# Altium PCB CindyLou Main Board copy_2023-08-16.pcbdoc (part 1 of 2)
Units mil, origin at the board's own origin, x right, y up, seen from the top; angles counter-clockwise.
Board outline 2655.6 x 2783.4 mil, 2 copper layers (Top Layer, Bottom Layer); 79 components, 76 nets, 317 pads, 120 vias.
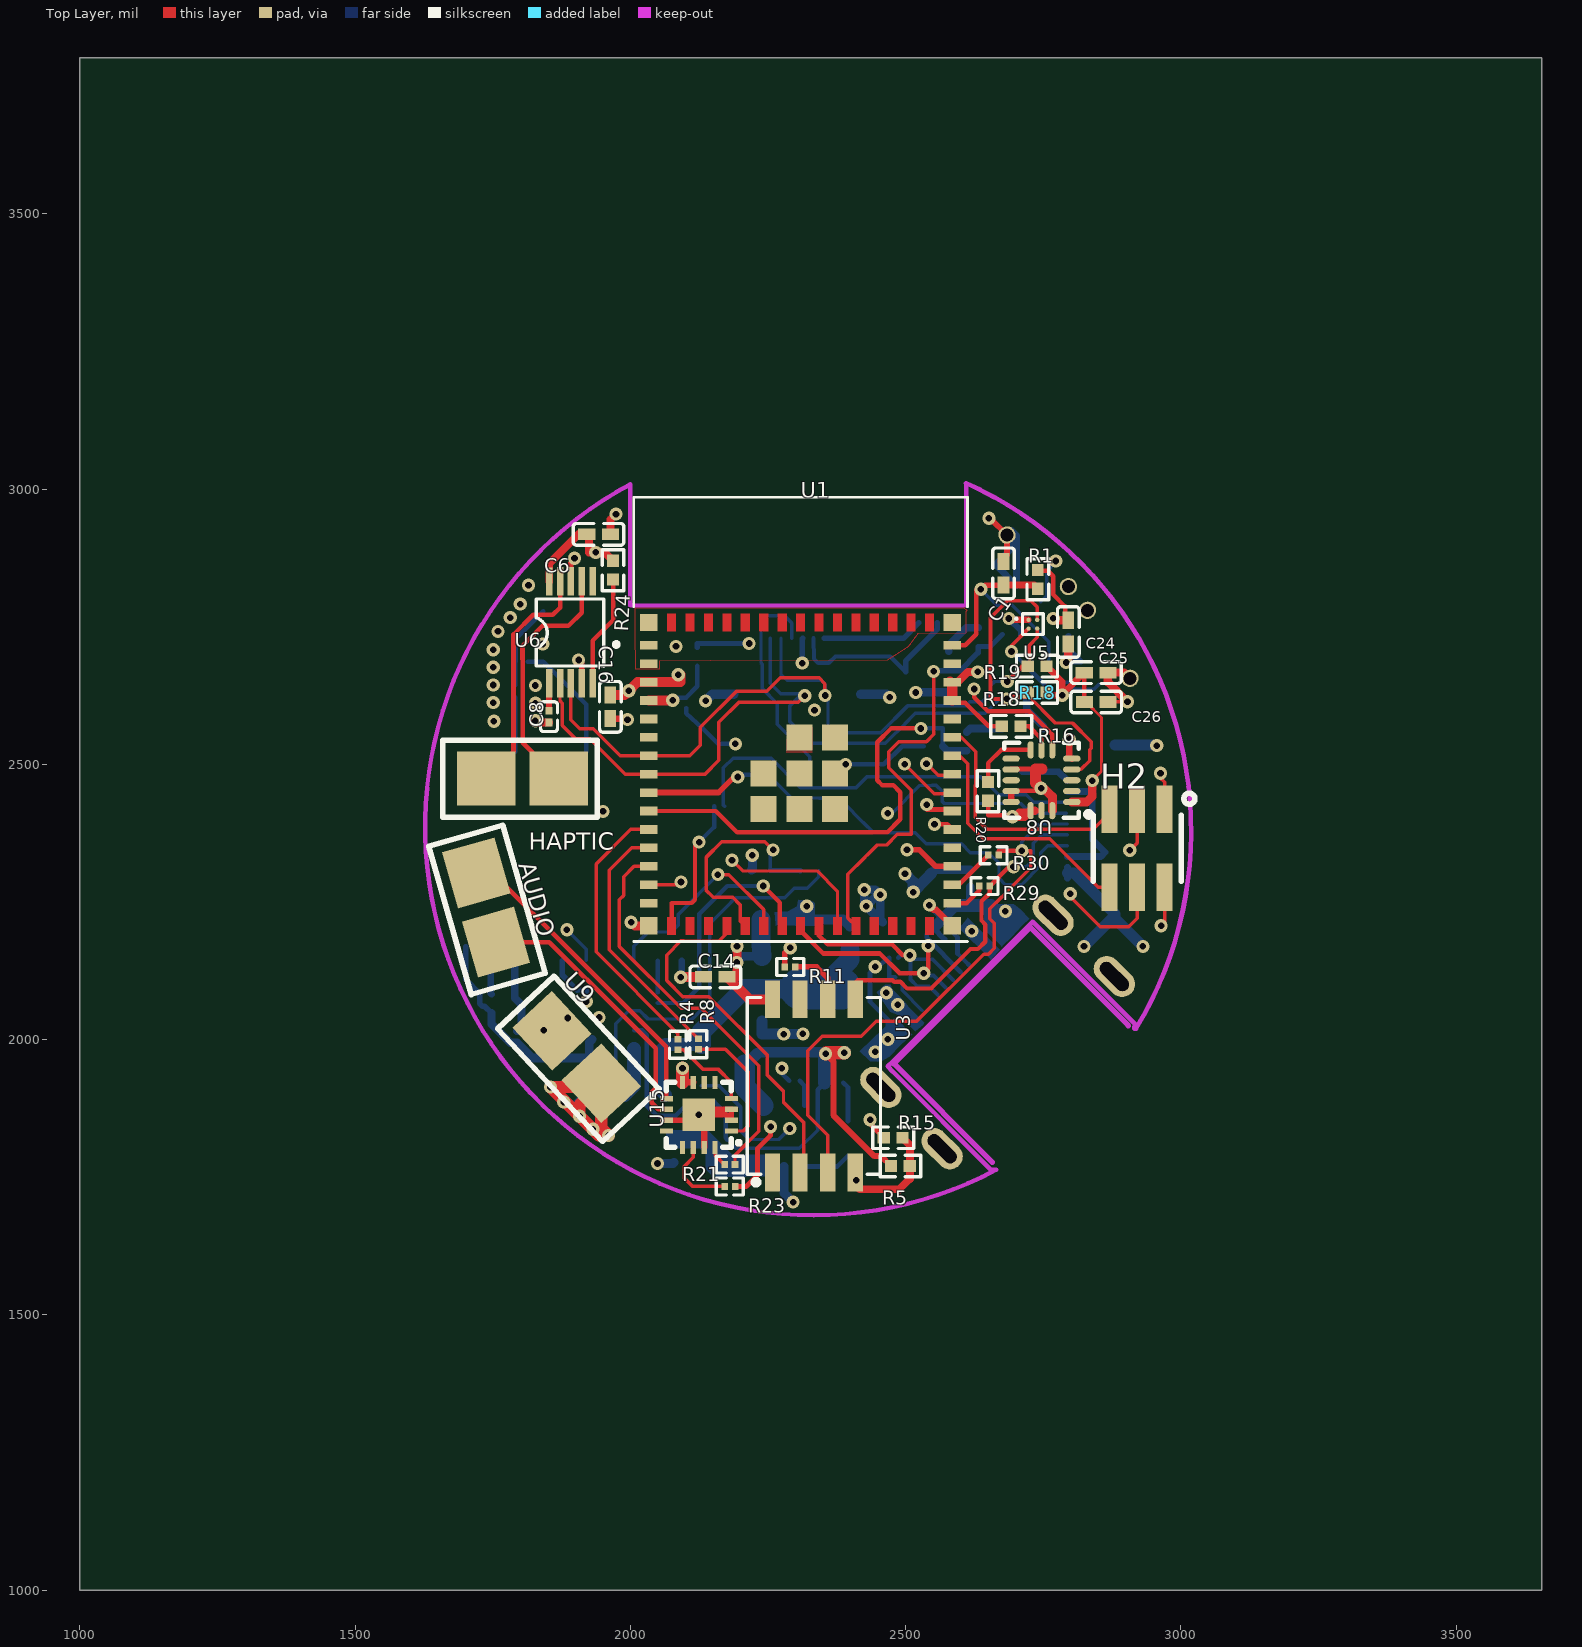
[diagram p0: Top Layer view]
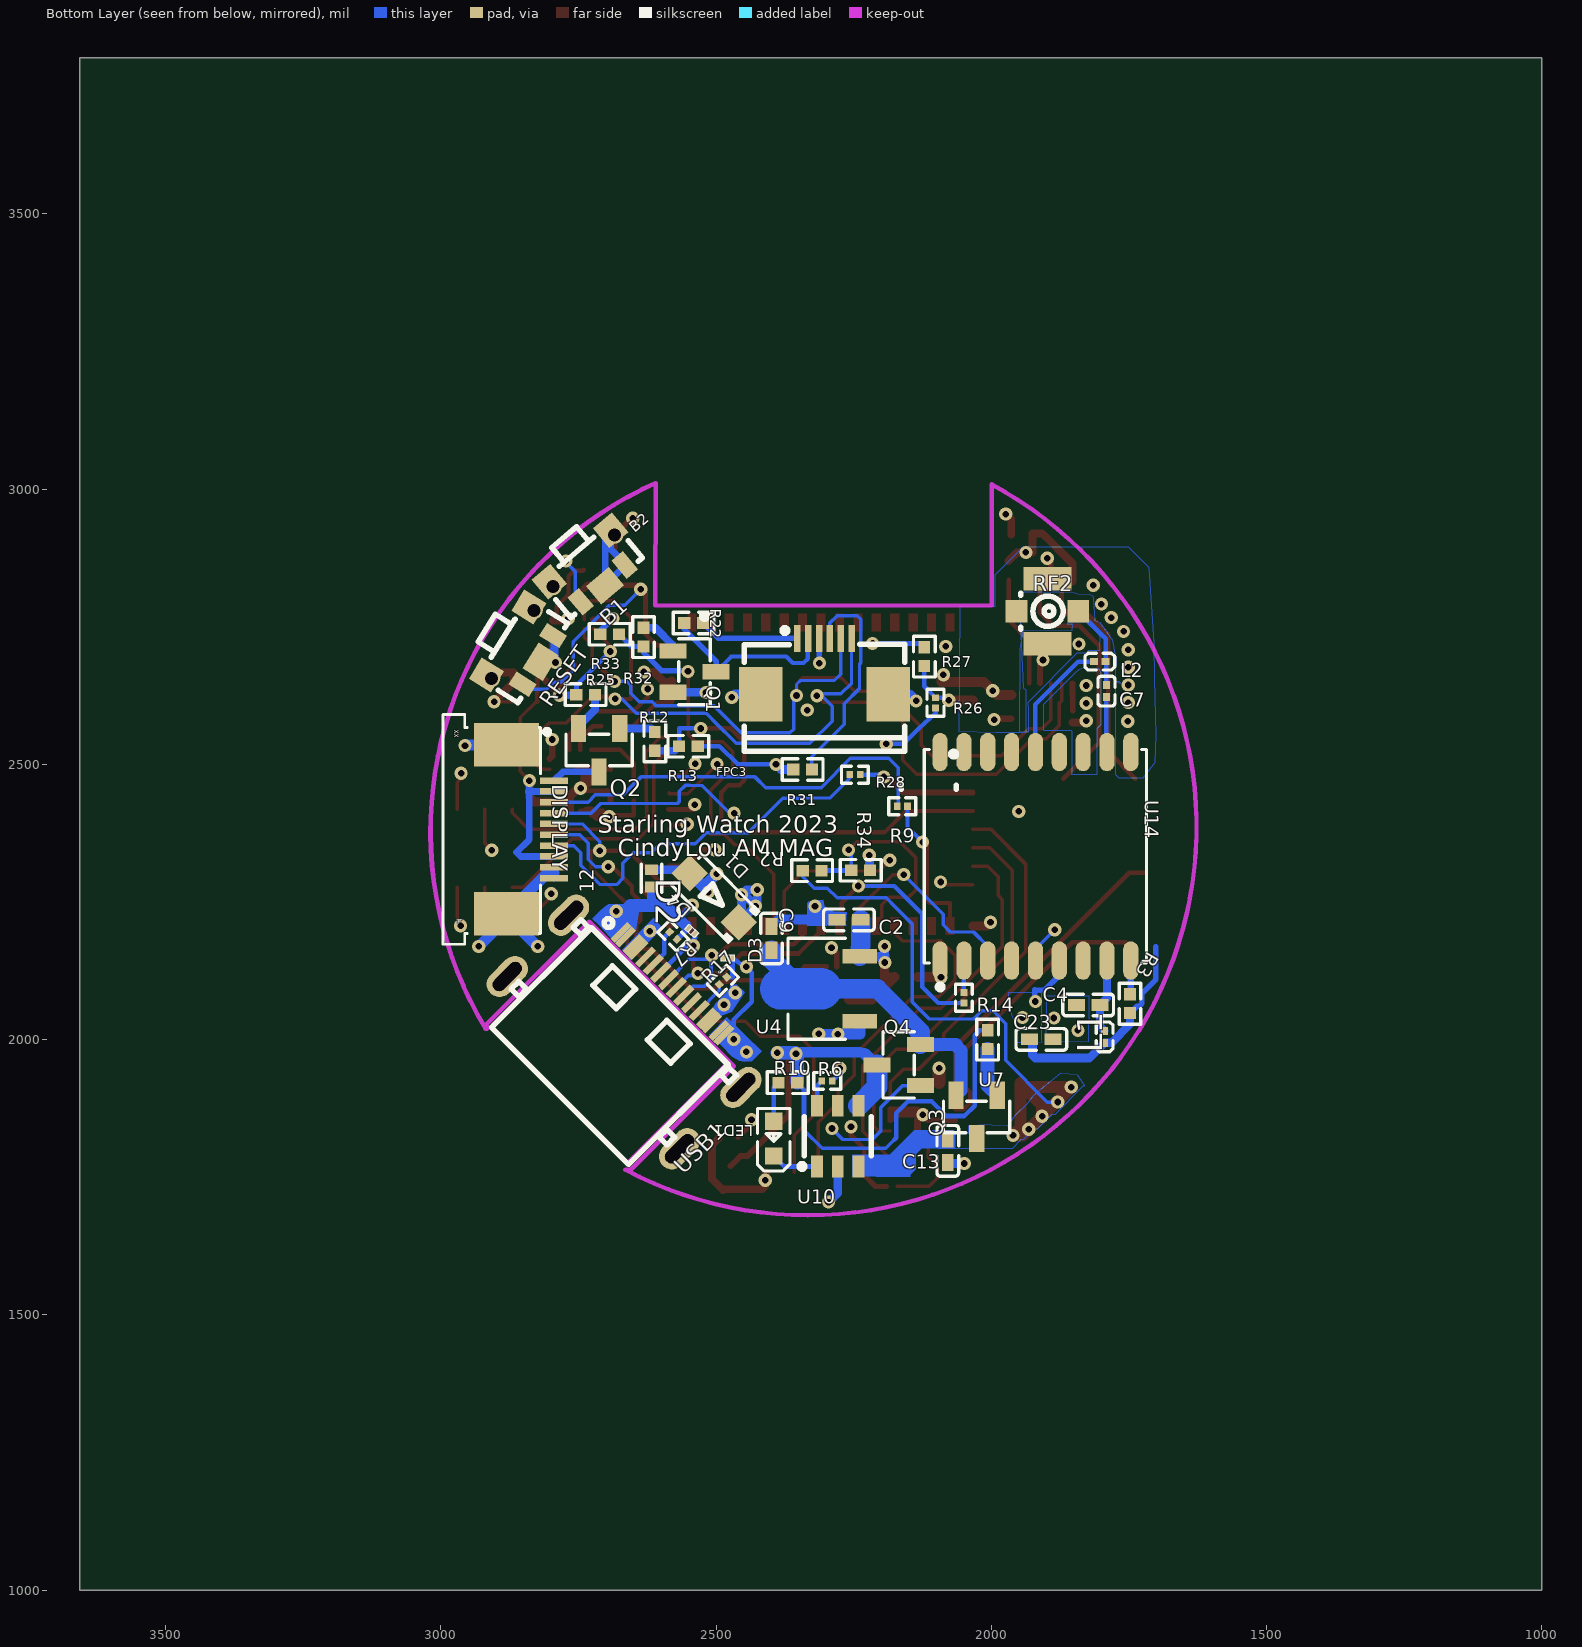
[diagram p1: Bottom Layer view, seen from below]

## Layer stack, top to bottom
Top Layer: signal copper (thickness not stored)
Dielectric: dielectric 12.6, FR-4, Dk 4.8
Bottom Layer: signal copper (thickness not stored)

## Board outline
3655.6,1000 1000,1000 1000,3783.4 3655.6,3783.4

## Components (designator, comment, footprint, x,y, rotation, side; value= is the part's Value field where it differs from the comment)
AUDIO "009176002884906" 009176002884906 1744.85,2180.16 r286 top
B1 "SKTDLHE010" KEY-SMD_SKTDLHE010 2848.72,2705.41 r302 bottom
B2 "SKTDLHE010" KEY-SMD_SKTDLHE010 2724.59,2851.6 r320 bottom
C1 "1uF" C0402#1 2677.92,2847.13 r90 top
C2 "10uF" C0402#2 2258.6,2217.6 r180 bottom
C4 "1uF" C0402#2 1823.9,2062.9 r0 bottom
C6 "1uF" C0402#1 1942.15,2917.96 r180 top
C7 "470pF" C0201#1 1790.7,2633.1 r270 bottom
C8 "1uF" C0201#2 1852.15,2586.66 r90 top
C9 "10uF" C0402#2 2399.1,2183.8 r90 bottom
C13 "10uF" C0402#2 2078.9,1797.9 r270 bottom
C14 "1uF" C0402#1 2154.3,2114 r0 top
C16 "1uF" C0402#1 1963.65,2604.66 r90 top
C23 "10uF" C0402#2 1909,2000.4 r180 bottom
C24 "2.2uF" C0402#1 2795.6,2740.5 r90 top
C25 "1uF" C0402#1 2846.02,2666.73 r180 top
C26 "1uF" C0402#1 2846.3,2613.3 r180 top
D1 "DSR1M_C466476" SOD-123FL_L2.8-W1.8-LS3.7-RD 2502.9,2257.8 r225 bottom
D2 "BDFN2C051V40" DFN-SMD_L1.0-W0.6-BI 2617.3,2292.9 r90 bottom
D3 "RCLAMP4041ZATFT" RCLAMP4021ZATFT 2478.5,2148.5 r270 bottom
D4 "RCLAMP4041ZATFT" RCLAMP4021ZATFT 2544.3,2197 r132 bottom
DISPLAY "F0501-T-10-20T-R" FPC-SMD_F0501-T-10-20T-R 2837.4,2381.9 r90 bottom
FPC3 "FPC-05F-6PH20" FPC-SMD_6P-P0.50_XUNPU_FPC-05F-6PH20 2303.05,2678.22 r0 bottom
H2 "X1321FVS-2X03-C43D48" HDR-SMD_6P-P1.27-V-F-R2-C3-LS4.8 2920.52,2347.63 r180 top
HAPTIC "009176002884906" 009176002884906 1744.45,2484.16 r180 top
L1 "47nH" L0201 1794.1,2004.9 r270 bottom
L2 "47nH" L0201 1802.8,2686.8 r180 bottom
LED1 "XL-1608SURC-06" LED0603-RD_RED 2395.13,1820.06 r270 bottom
Q1 "FDN340P_C2890122" SOT-23-3_L2.9-W1.3-P1.90-LS2.4-BR 2539.2,2668.4 r180 bottom
Q2 "FDN340P" SOT-23-3_L2.9-W1.3-P1.90-LS2.4-BR 2712.4,2525.9 r270 bottom
Q3 "FDN340P" SOT-23-3_L2.9-W1.3-P1.90-LS2.4-BR 2026.5,1859.5 r270 bottom
Q4 "FDN340P" SOT-23-3_L2.9-W1.3-P1.90-LS2.4-BR 2168.25,1953.96 r0 bottom
R1 "10KΩ" R0402#1 2740.22,2836.33 r270 top
R2 "30k" R0402#2 2325.45,2306.95 r0 bottom
R3 "6.8kΩ" R0402#2 1747.8,2065.3 r270 bottom
R4 "82Ω" R0201#1 2086.35,1990.86 r90 top
R5 "10.7K" R0402#1 2490.6,1770.3 r0 top
R6 "2kΩ" R0201#2 2298.1,1925 r0 bottom
R7 "5.6kΩ" R0201#2 2577.7,2188.8 r225 bottom
R8 "82Ω" R0201#1 2123.35,1991.76 r90 top
R9 "82Ω" R0201#2 2161.62,2423.93 r0 bottom
R10 "182Ω" R0402#2 2369.7,1921.7 r0 bottom
R11 "20Ω" R0201#1 2290.3,2131.9 r180 top
R12 "5.6KΩ" R0402#2 2611.22,2541.83 r270 bottom
R13 "100KΩ" R0402#2 2550.19,2532.9 r180 bottom
R14 "330Ω" R0201#2 2049.7,2076 r270 bottom
R15 "10.7K" R0402#1 2477.4,1821.7 r0 top
R16 "10K" R0402#1 2691.9,2569.1 r0 top
R17 "5.6kΩ" R0201#2 2487.4,2106.8 r315 bottom
R18 "1kΩ" R0402#1 2738.9,2630.6 r0 top
R19 "1kΩ" R0402#1 2738.8,2678.4 r0 top
R20 "10K" R0402#1 2649.82,2451.08 r90 top
R21 "82Ω" R0201#1 2180.55,1772.96 r0 top
R22 "10KΩ" R0402#2 2540.8,2756.9 r0 bottom
R23 "82Ω" R0201#1 2180.65,1733.16 r0 top
R24 "10K" R0402#1 1968.55,2852.76 r90 top
R25 "100Ω" R0402#2 2737.02,2626.63 r0 bottom
R26 "82Ω" R0201#2 2101.22,2611.93 r270 bottom
R27 "10KΩ" R0402#2 2121.5,2695.8 r90 bottom
R28 "82Ω" R0201#2 2247.7,2481.3 r0 bottom
R29 "20Ω" R0201#1 2643.22,2278.83 r0 top
R30 "20Ω" R0201#1 2659.82,2334.98 r0 top
R31 "10KΩ" R0402#2 2342.82,2490.78 r0 bottom
R32 "5.6KΩ" R0402#2 2631.8,2731.2 r270 bottom
R33 "100K" R0402#2 2693.19,2736.4 r0 bottom
R34 "6.8K" R0402#2 2237.15,2307.75 r0 bottom
RF2 "KH-IPEX-K501-29" ANT-SMD_KH-IPEX-K501-29 1897.92,2778.28 r270 bottom
U1 "ESP32-S3-MINI-1-CUSTOM" XCVR_ESP32-S3-MINI-1-N8-CUSTOM 2309.19,2497.8 r0 top
U3 "XTSD01GLGEAG" LGA-8_L6.0-W8.0-P1.27-BL 2333.2,1915.9 r0 top
U4 "MD7671A33PA1" SOT-89-3_L4.5-W2.5-P1.50-LS4.2-BR 2292.4,2092.3 r0 bottom
U5 "MMC5603NJ" FLIPCHIP-4_L0.8-W0.8-R2-C2-P0.40-TL 2731.2,2754.7 r0 top
U6 "DRV2605LDGSR" VSSOP-10_L3.0-W3.0-P0.50-LS4.9-BL 1891.85,2740.06 r0 top
U7 "680" R0402#2 2006.6,2000 r90 bottom
U8 "LIS3DHTR_C15134" LGA-16_L3.0-W3.0-P0.50-TL 2746.85,2471.16 r180 top
U9 "009176002884906" 009176002884906 1935.52,1918.03 r313 top
U10 "TP4057_C725791" SOT-23-6_L2.9-W1.6-P0.95-LS2.8-BR 2278.9,1824.6 r90 bottom
U14 "ATGM336H-5N31" GPSM-SMD_ATGM336H-TR 1919.72,2333.02 r180 bottom
U15 "MAX98357AETE+T" TQFN-16_L3.0-W3.0-P0.50-BL-EP1.5 2124.25,1863.36 r90 top
USB1 "USB-310CB" USB-C-SMD_20P-P0.50-L6.5-W11.2 2651.13,2029.87 r315 bottom

## Footprints (in the part's own frame and the unit in brackets; to place one, negate y for a bottom-side part, rotate by r counter-clockwise, add the part's x,y. Pads: shape width x height; smd on the part's side, far side on the other; paste and mask are expansions set on the pad)
009176002884906 [mm]
  rect 2.7x2.5 smd paste+0 mask+0.051: 1(-3.175,0.254) 2(0.152,0.254)
  silkscreen extent -4.95,-1.52 2.16,2.03
ANT-SMD_KH-IPEX-K501-29 [mm]
  rect 1.05x1 smd paste+0 mask+0.051: 1(0,1.425) 4(0,-1.425)
  rect 1.1x2.2 smd paste+0 mask+0.051: 2(1.5,0) 3(-1.5,0)
  silkscreen extent -0.84,-1.23 0.84,0.72
C0201#1 [mil]
  rect 14.51x12.76 smd paste-3937.01 mask+2: 1(10.8,0) 2(-10.8,0)
  silkscreen extent -27,-15 27,15
C0201#2 [mil]
  rect 14.51x12.76 smd paste-3937.01 mask+2: 1(-10.8,0) 2(10.8,0)
  silkscreen extent -27,-15 27,15
C0402#1 [mm]
  rect 0.79x0.54 smd paste-100 mask+0.051: 1(-0.545,0) 2(0.545,0)
  silkscreen extent -1.17,-0.5 1.17,0.5
C0402#2 [mm]
  rect 0.79x0.54 smd paste-100 mask+0.051: 1(0.545,0) 2(-0.545,0)
  silkscreen extent -1.17,-0.5 1.17,0.5
DFN-SMD_L1.0-W0.6-BI [mm]
  rect 0.5x0.6 smd paste+0 mask+0.05: 1(0.4,0) 2(-0.4,0)
  silkscreen extent -0.65,-0.47 0.65,0.47
FLIPCHIP-4_L0.8-W0.8-R2-C2-P0.40-TL [mm]
  round 0.2 smd paste-100 mask+0.051: A1(-0.2,0.2) A2(0.2,0.2) B1(-0.2,-0.2) B2(0.2,-0.2)
  silkscreen extent -0.81,-0.48 0.48,0.48
FPC-SMD_6P-P0.50_XUNPU_FPC-05F-6PH20 [mm]
  rect 0.3x1.25 smd paste+0 mask+0.05: 1(1.25,-1.288) 2(0.75,-1.288) 3(0.25,-1.288) 4(-0.25,-1.288) 5(-0.75,-1.288) 6(-1.25,-1.288)
  rect 2x2.5 smd paste+0 mask+0.05: 7(-2.94,1.288) 8(2.94,1.288)
  silkscreen extent -3.7,-1.78 3.7,3.91
FPC-SMD_F0501-T-10-20T-R [mm]
  rect 0.3x1.3 smd paste+0 mask+0.051: 1(2.25,-1.097) 2(1.75,-1.097) 3(1.25,-1.097) 4(0.75,-1.097) 5(0.25,-1.097) 6(-0.25,-1.097) 7(-0.75,-1.097) 8(-1.25,-1.097) 9(-1.75,-1.097) 10(-2.25,-1.097)
  rect 2x3 smd paste+0 mask+0.051: 11(-3.9,1.097) 12(3.9,1.097)
  silkscreen extent -5.3,-0.87 5.3,4.03
GPSM-SMD_ATGM336H-TR [mm]
  oval 0.7x1.773 smd paste+0 mask+0.051: 1(-4.4,-4.811) 2(-3.3,-4.811) 3(-2.2,-4.811) 4(-1.1,-4.811) 5(0,-4.811) 6(1.1,-4.811) 7(2.2,-4.811) 8(3.3,-4.811) 9(4.4,-4.811) 10(4.4,4.811) 11(3.3,4.811) 12(2.2,4.811) 13(1.1,4.811) 14(0,4.811) 15(-1.1,4.811) 16(-2.2,4.811) 17(-3.3,4.811) 18(-4.4,4.811)
  silkscreen extent -5.13,-6.15 5.13,4.93
HDR-SMD_6P-P1.27-V-F-R2-C3-LS4.8 [mm]
  rect 0.74x2.2 smd paste+0 mask+0.051: 1(-1.27,-1.8) 2(-1.27,1.8) 3(0,-1.8) 4(0,1.8) 5(1.27,-1.8) 6(1.27,1.8)
  silkscreen extent -2.67,-2.54 2.03,1.52
KEY-SMD_SKTDLHE010 [mm]
  rect 0.7x1.1 smd paste+0 mask+0.051: 1(1.325,0.75) 2(-1.325,0.75)
  rect 1.15x1.2 smd paste+0 mask+0.051: 3(-1.85,-0.9) 3(1.85,-0.9)
  round 0.8 hole 0.6 paste+0 mask+0.05: 3(-1.85,-0.608) 3(1.85,-0.608)
  rect 1.4x1.1 smd paste+0 mask+0.051: 3(0,0.9)
  silkscreen extent -2.16,-2.03 2.16,1.02
L0201 [mil]
  rect 14.51x12.76 smd paste-3937.01 mask+2: 1(10.8,0) 2(-10.8,0)
  silkscreen extent -27,-15 27,15
LED0603-RD_RED [mm]
  rect 0.8x0.8 smd paste+0 mask+0.051: 1(0.799,0.003) 2(-0.799,-0.004)
  silkscreen extent -1.39,-0.76 1.49,0.75
LGA-8_L6.0-W8.0-P1.27-BL [mil]
  rect 28x68.53 smd paste+0 mask+2: 1(-75,-157.3) 2(-25,-157.3) 3(25,-157.3) 4(75,-157.3) 5(75,157.29) 6(25,157.29) 7(-25,157.29) 8(-75,157.29)
  silkscreen extent -121,-180 121,160
LGA-16_L3.0-W3.0-P0.50-TL [mm]
  oval 0.8x0.28 smd paste+0 mask+0.051: 1(-1.4,1) 2(-1.4,0.5) 3(-1.4,0) 4(-1.4,-0.5) 5(-1.4,-1) 9(1.4,-1) 10(1.4,-0.5) 11(1.4,0) 12(1.4,0.5) 13(1.4,1)
  oval 0.28x0.8 smd paste+0 mask+0.051: 6(-0.5,-1.4) 7(0,-1.4) 8(0.5,-1.4) 14(0.5,1.4) 15(0,1.4) 16(-0.5,1.4)
  silkscreen extent -2.3,-1.72 1.73,1.73
R0201#1 [mil]
  rect 11.93x12.76 smd paste-3937.01 mask+2: 1(-9.51,0) 2(9.51,0)
  silkscreen extent -24,-15 24,15
R0201#2 [mil]
  rect 11.93x12.76 smd paste-3937.01 mask+2: 1(9.51,0) 2(-9.51,0)
  silkscreen extent -24,-15 24,15
R0402#1 [mm]
  rect 0.566x0.54 smd paste-100 mask+0.051: 1(-0.433,0) 2(0.433,0)
  silkscreen extent -0.94,-0.5 0.94,0.5
R0402#2 [mm]
  rect 0.566x0.54 smd paste-100 mask+0.051: 1(0.433,0) 2(-0.433,0)
  silkscreen extent -0.94,-0.5 0.94,0.5
RCLAMP4021ZATFT [mm]
  rect 0.27x0.25 smd paste+0 mask+0.05: 1(0,-0.212) 2(0,0.212)
  silkscreen extent -0.15,-0.3 0.15,0.3
SOD-123FL_L2.8-W1.8-LS3.7-RD [mm]
  rect 1.2x1.2 smd paste+0 mask+0.051: 1(1.6,0) 2(-1.6,0)
  silkscreen extent -1.8,-1 1.9,1
SOT-23-3_L2.9-W1.3-P1.90-LS2.4-BR [mm]
  rect 1.25x0.7 smd paste+0 mask+0.051: 1(-1,0.95) 2(-1,-0.95) 3(1,0)
  silkscreen extent -0.73,-1.53 0.73,1.53
SOT-23-6_L2.9-W1.6-P0.95-LS2.8-BR [mm]
  rect 1x0.55 smd paste+0 mask+0.051: 1(-1.4,0.95) 2(-1.4,0) 3(-1.4,-0.95) 4(1.4,-0.95) 5(1.4,0) 6(1.4,0.95)
  silkscreen extent -1.52,-1.55 0.9,1.78
SOT-89-3_L4.5-W2.5-P1.50-LS4.2-BR [mm]
  rect 1.575x0.672 smd paste+0 mask+0.051: 1(-1.356,1.5) 3(-1.356,-1.5)
  Top Layer region: 2.283,-0.95 0.429,-0.95 0.384,-0.949 0.34,-0.946 0.296,-0.94 0.252,-0.933 0.208,-0.924 0.165,-0.912 0.123,-0.899 0.081,-0.884 0.04,-0.866 0,-0.847 -0.04,-0.826 -0.078,-0.803 -0.115,-0.779 -0.151,-0.752 -0.185,-0.724 -0.219,-0.695 -0.251,-0.664 -0.281,-0.631 -0.31,-0.597 -0.337,-0.562 -0.362,-0.525 -0.386,-0.488 -0.408,-0.449 -0.428,-0.409 -0.447,-0.33 -2.144,-0.33 -2.144,0.33 -0.447,0.33 -0.428,0.409 -0.408,0.449 -0.386,0.488 -0.362,0.526 -0.337,0.562 -0.31,0.597 -0.281,0.631 -0.251,0.664 -0.219,0.695 -0.185,0.725 -0.151,0.753 -0.115,0.779 -0.078,0.804 -0.04,0.827 0,0.848 0.04,0.867 0.081,0.884 0.123,0.899 0.165,0.913 0.208,0.924 0.252,0.934 0.296,0.941 0.34,0.946 0.384,0.949 0.429,0.95 2.283,0.95 2.328,0.949 2.372,0.946 2.416,0.941 2.46,0.934 2.504,0.924 2.547,0.913 2.589,0.899 2.631,0.884 2.672,0.867 2.713,0.848 2.752,0.827 2.79,0.804 2.827,0.779 2.863,0.753 2.898,0.725 2.931,0.695 2.963,0.664 2.993,0.631 3.022,0.597 3.049,0.562 3.075,0.526 3.098,0.488 3.12,0.449 3.141,0.409 3.159,0.369 3.175,0.327 3.189,0.285 3.202,0.242 3.212,0.199 3.22,0.155 3.227,0.111 3.231,0.067 3.233,0.022 3.233,-0.022 3.231,-0.067 3.227,-0.111 3.22,-0.155 3.212,-0.199 3.202,-0.242 3.189,-0.285 3.175,-0.327 3.159,-0.369 3.141,-0.409 3.12,-0.449 3.098,-0.488 3.075,-0.525 3.049,-0.562 3.022,-0.597 2.993,-0.631 2.963,-0.664 2.931,-0.695 2.898,-0.724 2.863,-0.752 2.827,-0.779 2.79,-0.803 2.752,-0.826 2.713,-0.847 2.672,-0.866 2.631,-0.884 2.589,-0.899 2.547,-0.912 2.504,-0.924 2.46,-0.933 2.416,-0.94 2.372,-0.946 2.328,-0.949
  silkscreen extent -0.7,-2.33 1.95,2.33
TQFN-16_L3.0-W3.0-P0.50-BL-EP1.5 [mm]
  rect 0.25x0.6 smd paste+0 mask+0.051: 1(-0.749,-1.5) 2(-0.248,-1.5) 3(0.251,-1.5) 4(0.752,-1.5) 9(0.75,1.5) 10(0.25,1.5) 11(-0.25,1.5) 12(-0.749,1.5)
  rect 0.6x0.25 smd paste+0 mask+0.051: 5(1.5,-0.748) 6(1.5,-0.248) 7(1.5,0.252) 8(1.5,0.752) 13(-1.5,0.752) 14(-1.5,0.252) 15(-1.5,-0.248) 16(-1.5,-0.748)
  rect 1.5x1.5 smd paste+0 mask+0.051: 17(0,0)
  silkscreen extent -1.5,-1.9 1.5,1.5
USB-C-SMD_20P-P0.50-L6.5-W11.2 [mm]
  oval 2.2x1.2 hole 0.6 slot 1.65 at 0 deg paste+0 mask+0.051: 0(-1.425,5.62) 0(-1.425,-5.62) 0(2.575,5.62) 0(2.575,-5.62)
  rect 1.1x0.3 smd paste-100 mask+0.051: A1(-2.575,-3.349) A4(-2.575,-2.549) A5(-2.575,-1.25) A6(-2.575,-0.251) A7(-2.575,0.25) A8(-2.575,1.251) A9(-2.575,2.551) A12(-2.575,3.35) B1(-2.575,3.049) B4(-2.575,2.25) B5(-2.575,1.751) B6(-2.575,0.75) B7(-2.575,-0.751) B8(-2.575,-1.749) B9(-2.575,-2.25) B12(-2.575,-3.05)
  Keep-Out Layer lines w0.254: -1.779,4.423 -1.779,-4.477 ; -1.775,4.423 4.641,4.423 ; -1.76,-4.476 4.641,-4.476
  silkscreen extent -2.67,-5.08 4.74,5.08
VSSOP-10_L3.0-W3.0-P0.50-LS4.9-BL [mm]
  rect 0.3x1.3 smd paste+0 mask+0.015: 1(-1,-2.35) 2(-0.5,-2.35) 3(0,-2.35) 4(0.5,-2.35) 5(1,-2.35)
  rect 0.3x1.3 smd paste+0 mask+0.051: 6(1,2.35) 7(0.5,2.35) 8(0,2.35) 9(-0.5,2.35) 10(-1,2.35)
  silkscreen extent -1.6,-1.56 1.52,1.54
XCVR_ESP32-S3-MINI-1-N8-CUSTOM [mil]
  rect 31.5x15.75 smd paste+0 mask+4: 1(-275.59,218.66) 2(-275.59,185.2) 3(-275.59,151.73) 4(-275.59,118.27) 5(-275.59,84.8) 6(-275.59,51.34) 7(-275.59,17.87) 8(-275.59,-15.59) 9(-275.59,-49.05) 10(-275.59,-82.52) 11(-275.59,-115.98) 12(-275.59,-149.45) 13(-275.59,-182.91) 14(-275.59,-216.38) 15(-275.59,-249.84) 31(275.59,-249.84) 32(275.59,-216.38) 33(275.59,-182.91) 34(275.59,-149.45) 35(275.59,-115.98) 36(275.59,-82.52) 37(275.59,-49.05) 38(275.59,-15.59) 39(275.59,17.87) 40(275.59,51.34) 41(275.59,84.8) 42(275.59,118.27) 43(275.59,151.73) 44(275.59,185.2) 45(275.59,218.66)
  rect 31.5x31.5 smd paste+0 mask+4: 62(-275.59,260) 63(-275.59,-291.18) 64(275.59,-291.18) 65(275.59,260)
  Top Layer region: -242.13,275.75 -226.38,275.75 -226.38,244.25 -242.13,244.25
  Top Layer region: -208.66,275.75 -192.91,275.75 -192.91,244.25 -208.66,244.25
  Top Layer region: -175.2,275.75 -159.45,275.75 -159.45,244.25 -175.2,244.25
  Top Layer region: -141.73,275.75 -125.98,275.75 -125.98,244.25 -141.73,244.25
  Top Layer region: -108.27,275.75 -92.52,275.75 -92.52,244.25 -108.27,244.25
  Top Layer region: -74.8,275.75 -59.06,275.75 -59.06,244.25 -74.8,244.25
  Top Layer region: -41.34,275.75 -25.59,275.75 -25.59,244.25 -41.34,244.25
  Top Layer region: 25.59,275.75 41.34,275.75 41.34,244.25 25.59,244.25
  Top Layer region: -7.87,275.75 7.87,275.75 7.87,244.25 -7.87,244.25
  Top Layer region: 59.06,275.75 74.8,275.75 74.8,244.25 59.06,244.25
  Top Layer region: 92.52,275.75 108.27,275.75 108.27,244.25 92.52,244.25
  Top Layer region: 125.98,275.75 141.73,275.75 141.73,244.25 125.98,244.25
  Top Layer region: 159.45,275.75 175.2,275.75 175.2,244.25 159.45,244.25
  Top Layer region: 192.91,275.75 208.66,275.75 208.66,244.25 192.91,244.25
  Top Layer region: 226.38,275.75 242.13,275.75 242.13,244.25 226.38,244.25
  Top Layer region: 226.38,-275.43 242.13,-275.43 242.13,-306.93 226.38,-306.93
  Top Layer region: 192.91,-275.43 208.66,-275.43 208.66,-306.93 192.91,-306.93
  Top Layer region: 159.45,-275.43 175.2,-275.43 175.2,-306.93 159.45,-306.93
  Top Layer region: 125.98,-275.43 141.73,-275.43 141.73,-306.93 125.98,-306.93
  Top Layer region: 92.52,-275.43 108.27,-275.43 108.27,-306.93 92.52,-306.93
  Top Layer region: 59.06,-275.43 74.8,-275.43 74.8,-306.93 59.06,-306.93
  Top Layer region: 25.59,-275.43 41.34,-275.43 41.34,-306.93 25.59,-306.93
  Top Layer region: -7.87,-275.43 7.87,-275.43 7.87,-306.93 -7.87,-306.93
  Top Layer region: -41.34,-275.43 -25.59,-275.43 -25.59,-306.93 -41.34,-306.93
  Top Layer region: -74.8,-275.43 -59.06,-275.43 -59.06,-306.93 -74.8,-306.93
  Top Layer region: -108.27,-275.43 -92.52,-275.43 -92.52,-306.93 -108.27,-306.93
  Top Layer region: -141.73,-275.43 -125.98,-275.43 -125.98,-306.93 -141.73,-306.93
  Top Layer region: -175.2,-275.43 -159.45,-275.43 -159.45,-306.93 -175.2,-306.93
  Top Layer region: -208.66,-275.43 -192.91,-275.43 -192.91,-306.93 -208.66,-306.93
  Top Layer region: -242.13,-275.43 -226.38,-275.43 -226.38,-306.93 -242.13,-306.93
  silkscreen extent -303,-320 303,487

## Free pads (board coordinates)
  rect 47.24x47.24 smd paste+0 mask+4: 61(2307.02,2483.73) 61_2(2307.02,2548.69) 61_3(2371.98,2548.69) 61_4(2371.98,2483.73) 61_5(2371.98,2418.77) 61_6(2307.02,2418.77) 61_7(2242.06,2418.77) 61_8(2242.06,2483.73)

## Via types
v1: diameter 24, hole 12, Top Layer to Bottom Layer, tented both sides, 120 vias

## Nets (pads, with @x,y where several pads share a name; then routed paths per layer and width w, separated by ;. In a path a pad name is that pad's centre, name@x,y a point inside that pad or via, vN(x,y) a via of type N, cw(c..) or ccw(c..) an arc to the next point about the centre after c; other vN are vias at no path point)
0: B2.1 R27.1 | length 840.7
  Mid-Layer 2 w8: v1@2215.62,2719.63 2571.42,2719.63 2685.82,2834.03 2685.82,2864.23 2711.32,2889.73 2753.82,2889.73 2772.82,2870.73 v1(2772.8,2869.6)
  Bottom Layer w6.3: B2.1@2745.57,2795.45 2756.1,2805.98 2756.1,2850.5 2772.8,2867.2 v1(2772.8,2869.6)
  Bottom Layer w10: R27.1@2121.5,2712.84 2121.5,2719.63 v1(2215.65,2719.66)
AUDIO-OUT+: AUDIO.1 U15.9 | length 570.2
  Top Layer w8.31: AUDIO.1@1720,2303.07 1749.13,2303.07 2065.19,1987.01 U15.9@2065.2,1892.89
AUDIO-OUT-: AUDIO.2 U15.10 | length 503.4
  Top Layer w8.31: AUDIO.2@1756.12,2177.13 1852.62,2177.13 1986.02,2044.13 ; 1986.05,2044.16 2046.05,1984.16 2046.05,1911.66 2038.55,1904.16 2038.55,1885.16 2050.5,1873.2 U15.10@2065.2,1873.2
BATTERY: C13.2 Q3.3 R2.1 U9.2 U10.3 | length 1191.7
  Top Layer w22.36: v1(1907.65,1860.86) 1907.64,1881.2 U9.2@1946.91,1920.47 ; U9.2@1946.91,1920.47 1940.2,1913.76 1854.75,1913.76 1942.65,1825.86 v1(1960.45,1825.86) 1946.94,1839.36 U9.2@1946.91,1920.47
  Bottom Layer w6.3: v1@1879.02,1886.53 1897.92,1886.53 1973.72,1962.33 1973.72,2029.13 1996.72,2052.13 2017.22,2052.13 2031.92,2037.43 2112.72,2037.43 2143.92,2068.63 2143.92,2210.43 2173.92,2240.43 2191.02,2257.53 2280.12,2257.53 2297.62,2275.03 2321.62,2275.03 2342.52,2295.93 R2.1@2342.52,2306.93
  other v1: 1931.95,1837.26 1879.05,1886.56 1854.75,1913.76
BATTERY_SENSOR: R2.2 R34.1 | length 407.7
  Top Layer w6.3: 2208.8,2206.62 2199.2,2216.22 2199.2,2245.2 2185.8,2258.6 2150.3,2258.6 2137.4,2271.5 2137.4,2330.8 2166.3,2359.7 2244.1,2359.7 v1(2259.2,2344.6)
  Bottom Layer w6.3: R34.1@2254.19,2307.75 2254.19,2339.59 v1(2259.2,2344.6)
  Bottom Layer w10.3: R34.1@2254.22,2307.73 R2.2@2308.42,2306.93
BCLK: R21.1 U15.16 | length 38.5
  Top Layer w6.3: U15.16@2153.7,1804.31 2153.69,1790.31 R21.1@2171.04,1772.96
BK: R12.1 R13.2 U1.10 | length 860.4
  Top Layer w8: U1.10@2033.6,2415.28 2155.27,2415.28 2194.12,2376.43 2466.42,2376.43 2490.22,2400.23 2490.22,2449.53 2477.42,2462.43 2457.22,2462.43 2448.62,2471.03 2448.62,2540.33 2473.59,2565.3 v1(2527.79,2565.3)
  Bottom Layer w8: v1(2527.79,2565.3) 2567.22,2565.33 R13.2@2567.23,2532.9
  Bottom Layer w14: R13.2@2567.23,2532.9 2575.37,2524.76 R12.1@2611.22,2524.79
CC1: R7.2 USB1.A5 | length 71.4
  Bottom Layer w8.4: R7.2@2584.43,2195.53 2594.22,2185.72 2594.22,2156.43 USB1.A5@2614.24,2136.36
CC2: R17.1 USB1.B5 | length 62.4
  Bottom Layer w6: R17.1@2494.12,2100.08 2494.12,2089.33 USB1.B5@2530.62,2052.83
CHIP_PU: B1.1 C1.1 R1.2 U1.45 | length 574.9
  Top Layer w8.4: U1.45@2584.78,2716.46 2608.05,2716.46 2628.12,2736.53 2628.12,2818.33 v1(2636.8,2818.3)
  Top Layer w10.4: v1(2636.8,2818.3) 2644.17,2825.67 C1.1@2677.92,2825.67
  Top Layer w12.4: C1.1@2677.92,2825.67 2733.79,2825.67 R1.2@2740.22,2819.29
  Bottom Layer w6.3: v1(2636.8,2818.3) 2665.92,2789.23 2693.52,2789.23 2759.72,2722.93 2759.72,2671.53 2782.22,2649.03 2795.22,2649.03 2807.72,2636.53 2842.32,2636.53 B1.1@2851.32,2645.52
CS_DISPLAY: DISPLAY.3 R9.1 | length 752.4
  Bottom Layer w6.3: R9.1@2171.12,2423.63 2168.92,2426.13 2168.92,2493.53 2186.52,2511.13 2255.82,2511.13 2309.12,2457.83 2409.92,2457.83 2429.22,2477.13 2636.32,2477.13 2669.02,2444.53 2719.12,2444.53 2732.52,2431.13 DISPLAY.3@2794.22,2431.12
CS_STORAGEN: U3.2 | length 701
  Top Layer w6: 2091.72,2179.23 2161.72,2179.23 2175.33,2192.84 2175.33,2206.62 2177.64,2208.93 2177.64,2209.63
  Top Layer w6.3: 2096.6,2179.23 2091.72,2179.23 2065.89,2153.4 2065.89,2107.4 2095.21,2078.08 2142.41,2078.08 2248.99,1971.5 2248.99,1935.56 2263.29,1921.26 ; 2249.02,1939.93 2249.02,1935.43 2278.12,1906.33 2278.12,1886.43 2314.52,1850.03 2314.52,1764.93 U3.2@2308.2,1758.61
D/C: DISPLAY.7 R28.1 | length 700
  Bottom Layer w5.98: 2423.72,2393.73 2441.72,2375.73 2517.72,2375.73 2537.72,2355.73 2601.72,2355.73 2617.62,2339.73 2650.62,2339.73 2669.72,2320.73 2669.72,2292.73 2680.72,2281.73 2710.72,2281.73 2745.72,2316.73 2745.72,2339.73 2758.42,2352.33 DISPLAY.7@2794.22,2352.33
  Bottom Layer w6: R28.1@2257.21,2481.3 2257.22,2474.73 2293.12,2438.83 2350.63,2438.43 ; 2342.72,2438.43 2379.02,2438.43 2430.52,2386.93
DIN: R8.1 U15.1 | length 240
  Top Layer w6.3: R8.1@2123.35,1982.25 2172.72,1982.23 2213.72,1941.33 2213.72,1842.63 2205.02,1833.93 U15.1@2183.3,1833.89
DISPLAY_1: DISPLAY.1 Q2.3 | length 176.9
  Bottom Layer w8.31: Q2.3@2712.4,2486.53 2778.17,2486.53 DISPLAY.1@2794.22,2470.49
  Bottom Layer w12.32: Q2.3@2712.4,2486.53 2778.17,2486.53 DISPLAY.1@2794.22,2470.49
FPC3_1: FPC3.1 R22.2 | length 183.1
  Bottom Layer w10: FPC3.1@2352.22,2728.93 2495.82,2728.93 R22.2@2523.72,2756.93
FPC3_4: FPC3.4 R31.2 | length 401.4
  Bottom Layer w6.3: FPC3.4@2293.21,2728.91 2293.2,2756.8 2280.05,2769.96 2243.64,2769.96 2237.25,2763.56 2237.25,2684.26 2239.35,2682.16 2239.35,2637.86 2266.74,2610.46 2266.74,2572.66 2325.79,2513.61 R31.2@2325.78,2490.78
GESTURE-BOARD-POWER: FPC3.2 Q1.3 R22.1 | length 335.7
  Bottom Layer w7.87: FPC3.2@2332.58,2728.91 2333.52,2691.63 2341.02,2684.13 2360.52,2684.13 2372.52,2696.13 2472.12,2696.13 Q1.3@2499.83,2668.4
  Bottom Layer w10: Q1.3@2499.83,2668.4 2499.83,2687.73 2557.84,2745.74 R22.1@2557.84,2756.9
GESTURE-POWER: R32.1 R33.2 | length 802.5
  Top Layer w6.3: 2409.58,2206.62 2395.22,2220.98 2395.22,2300.23 2425.43,2330.44 ; 2409.62,2314.63 2448.52,2353.53 2465.52,2353.53 2485.02,2373.03 2510.02,2373.03 2510.02,2452.93 2469.32,2493.63 2469.32,2522.93 2487.82,2541.43 2537.92,2541.43 2550.92,2554.43 v1(2550.9,2668.9)
  Bottom Layer w9: R32.1@2631.8,2714.16 2653.91,2714.16 R33.2@2676.15,2736.4
  Bottom Layer w10: v1(2550.9,2668.9) 2551.7,2669.7 2598.4,2669.7 2631.8,2703.1 R32.1@2631.8,2714.16
GND: B1.2 B1.3 B2.2 B2.3 C1.2 C2.2 C4.1 C6.1 C8.1 C9.1 C13.1 C14.1 C16.1 C23.1 C24.1 C25.1 C26.1 D2.2 D3.2 D4.2 DISPLAY.9 DISPLAY.10 DISPLAY.11 DISPLAY.12 FPC3.3 FPC3.7 FPC3.8 pad.61 pad.61_2 pad.61_3 pad.61_4 pad.61_5 pad.61_6 pad.61_7 pad.61_8 R5.2 R6.2 R7.1 R13.1 R15.2 R16.1 R17.2 R31.1 R33.1 R34.2 RF2.2 RF2.3 RF2.4 U1.1 U1.2 U1.42 U1.43 U1.62 U1.63 U1.64 U1.65 U3.4 U4.1 U5.A1 U6.4 U6.8 U8.5 U8.10 U8.12 U8.13 U8.16 U9.1 U10.2 U14.1 U14.10 U14.12 U15.2 U15.3 U15.11 U15.15 U15.17 USB1.A1 USB1.A12 USB1.B1 USB1.B12 | length 3574.1
  Top Layer w6: C26.1@2867.72,2613.33 2868.09,2613.7 v1(2903.2,2613.7)
  Top Layer w7.87: U8.12@2697.22,2452.13 2746.12,2452.13 v1@2746.12,2456.43
  Top Layer w8: U1.42@2584.78,2616.07 2588.82,2612.03 2608.02,2612.03 2650.95,2569.1 R16.1@2674.86,2569.1
  Top Layer w8.3: U8.10@2691.73,2490.84 2705.53,2490.84 U8.10@2706.22,2491.53
  Top Layer w9.8: U8.10@2691.73,2490.84 2735.82,2491.53
  Top Layer w10.3: U8.12@2691.73,2451.47 2696.56,2451.47 U8.12@2697.22,2452.13
  Top Layer w10.31: U6.8@1891.82,2832.53 1891.82,2865.53 1898.45,2872.16 v1(1898.45,2874.66) ; v1@1905.95,2689.66 1911.53,2684.07 U6.4@1911.53,2647.54 ; U15.11@2065.2,1853.52 2114.4,1853.51 v1(2124.25,1863.36) ; v1(2124.25,1863.36) 2134.15,1873.26 U15.3@2183.3,1873.26 U15.2@2183.3,1853.58 2173.51,1863.36 v1(2124.25,1863.36)
  Top Layer w10.4: v1(2651.3,2947.3) 2653.6,2947.33 B2.3@2684.19,2916.76 2684.18,2880.79 2672.02,2868.63 C1.2@2677.92,2868.59
  Top Layer w11.65: C16.1@1963.65,2583.2 1992.91,2583.2 v1(1994.79,2581.32) ; v1(2687.69,2765.1) 2690.22,2762.57 U5.A1@2723.33,2762.57 ; U8.13@2691.73,2431.78 U8.12@2691.73,2451.47
  Top Layer w11.81: v1(2797.49,2545.3) 2797.49,2514.99 U8.5@2801.97,2510.53
  Top Layer w12.3: v1(2543.2,2244.4) 2551.82,2235.78 2555.62,2235.78 U1.64@2584.78,2206.62
  Top Layer w12.32: v1(2124.25,1863.36) 2134.01,1853.6 U15.15@2134.01,1804.31
  Top Layer w14.3: U3.4@2408.2,1758.61 2410.57,1756.23 v1(2410.58,1744.42) ; v1(2410.58,1744.42) 2410.57,1734.03 2416.6,1728 2486.6,1728 2487.6,1727 2507.64,1747.04 R5.2@2507.64,1770.3 2507.64,1808.5 R15.2@2494.44,1821.7 ; U1.43@2584.78,2649.53 2594.52,2649.53 2613.02,2668.03 v1(2631,2668)
  Top Layer w14.33: v1@1827.35,2579.26 1830.74,2575.86 C8.1@1852.15,2575.86 ; C6.1@1963.61,2917.96 1963.6,2944.61 v1@1973.75,2954.76
  Top Layer w15: v1(2791.6,2685.1) 2795.6,2689.1 C24.1@2795.6,2719.04 ; C25.1@2867.44,2666.77 2867.44,2649.46 v1(2903.2,2613.7) ; C25.1@2867.48,2666.73 2897.18,2666.73 B1.3@2907.62,2656.32
  Top Layer w16.3: v1(2001.3,2213.2) 2007.88,2206.62 U1.63@2033.6,2206.62 ; v1(2746.12,2456.47) 2751.42,2456.47 2766.53,2441.36 U8.16@2766.52,2416.04
  Top Layer w18: v1(2091.3,2113.2) 2092.1,2114 C14.1@2132.84,2114
  Top Layer w18.3: U1.43@2580.79,2650.23 2584.78,2646.24 U1.42@2584.78,2616.07
  Top Layer w20.3: v1(2746.12,2456.47) 2735.84,2466.75 2735.84,2491.53 2747.22,2491.53
  Bottom Layer w8.3: v1(2275.22,1947.77) 2275.22,1938.37 R6.2@2288.59,1925
  Bottom Layer w8.31: v1(2390.99,2499.9) 2460.22,2499.93 2493.82,2532.93 R13.1@2533.12,2532.93
  Bottom Layer w8.4: v1(2467.82,2000.67) 2467.82,2036.53 2435.32,2069.03 2435.32,2101.83 2435.32,2121.73 D3.2@2470.15,2148.5 2470.12,2113.53 R17.2@2480.68,2113.53
  Bottom Layer w10: v1(2312.15,2684.06) 2312.15,2728.21 FPC3.3@2312.89,2728.95 ; D4.2@2550.51,2202.59 R7.1@2571.02,2182.03
  Bottom Layer w10.3: v1(2791.6,2685.1) 2793.12,2686.62 2818.65,2686.62 2796.01,2709.26 B1.2@2796.04,2734 2791.6,2729.58 v1(2791.6,2685.1)
  Bottom Layer w11.65: v1(2543.2,2244.4) 2565.19,2222.41 2565.19,2217.27 ; v1(2687.69,2765.1) 2710.23,2742.56 R33.1@2710.23,2736.4
  Bottom Layer w12: v1(2091.3,2113.2) 2092.93,2114.83 U14.1@2092.95,2143.59
  Bottom Layer w12.01: DISPLAY.10@2794.22,2293.32 DISPLAY.9@2794.22,2313.01
  Bottom Layer w12.3: B2.3@2701.42,2826.96 2701.42,2915.71 B2.3@2691.57,2925.56 2691.57,2891.33 2665.26,2865.02 2665.26,2861.03 B2.3@2701.82,2824.46
  Bottom Layer w12.4: v1@2674.92,2239.43 v1(2681.32,2233.13)
  Bottom Layer w16.02: R31.1@2359.86,2490.78 2381.87,2490.78 v1(2390.99,2499.9) ; 2617.3,2243.5 D2.2@2617.3,2277.15
  Bottom Layer w16.3: v1(2049.15,1774.86) 2077.35,1774.86 C13.1@2078.9,1776.44 ; R34.2@2220.11,2307.75 2221.5,2309.14 v1(2221.5,2335.1) ; U10.2@2278.9,1769.48 2278.9,1721.5 v1(2295.6,1704.8)
  Bottom Layer w17.68: v1(2136.59,2615.4) 2148.76,2627.57 FPC3.7@2187.3,2627.57 ; 2309.49,2218.3 2386.06,2218.3 C9.1@2399.1,2205.26 ; FPC3.8@2418.8,2627.57 2465.42,2627.57 v1(2471.29,2621.7)
  Bottom Layer w17.76: v1@2278.62,2010.03 v1@2313.42,2010.23
  Bottom Layer w20.04: 2554.99,2207.3 2588.42,2240.5 ; 2794.22,2303.03 2805.91,2303.03 DISPLAY.11@2880.58,2228.36 ; v1(2824.1,2169.3) 2880.58,2225.78 DISPLAY.11@2880.58,2228.36 ; DISPLAY.12@2880.58,2535.45 2954.76,2535.45 v1(2956.1,2534.1) ; v1(2931.1,2169.3) 2880.58,2219.82 DISPLAY.11@2880.58,2228.36
  Bottom Layer w20.3: U4.1@2239.02,2033.23 2239.02,2010.07 v1(2278.62,2010.07)
  Bottom Layer w24.05: 2591.42,2243.5 2655.11,2243.5 2665.72,2232.89
  other v1: 2444.82,1977.61 2313.42,2010.27 1842.65,2016.76 1886.15,2039.26 2444.8,2132.4 2320.2,2242.1 1950.2,2414.6 1751.99,2578.3 1827.35,2579.26 2334.4,2598.7 1827.35,2611.26 1751,2612.3 1827.35,2643.26 1751,2644.3 1751,2676.3 1905.95,2689.66 1751,2708.3 2082.8,2714.3 1840.75,2718.76 1759.5,2741.6 1781.8,2766.7 1799.95,2791.16 1814.8,2825.6 1973.75,2954.76
GPS_RX: U14.3 | length 383.2
  Top Layer w6.3: v1(2159,2299.7) 2178.9,2299.7 2242.26,2236.34 2242.26,2206.62
  Bottom Layer w6.3: U14.3@2006.33,2143.59 2006.33,2169.53 2032.3,2195.5 2074.4,2195.5 2087.3,2208.4 2087.3,2228 v1(2159,2299.7)
GPS_TX: R14.1 | length 444.1
  Top Layer w8: v1(2241.3,2279.1) 2271.62,2248.78 2271.62,2210.73 2275.73,2206.62
  Bottom Layer w8: R14.1@2049.7,2066.49 2096.22,2066.53 2125.22,2095.53 2125.22,2228.23 2176.12,2279.13 v1(2241.3,2279.1)
GPSPOWER: U14.5 | length 764.7
  Top Layer w6: v1(2184.5,2325.7) 2203.92,2306.33 2339.52,2306.33 2376.12,2269.73 2376.12,2206.62
  Mid-Layer 2 w6: v1(1884.7,2199.5) 1884.7,2309.3 1899.8,2324.4 2183.2,2324.4 v1(2184.5,2325.7)
  Bottom Layer w6: v1(1884.7,2199.5) 1919.7,2164.5 U14.5@1919.72,2143.59
HAPTIC-OUT+: HAPTIC.1 U6.7 | length 457.6
  Top Layer w8.31: HAPTIC.1@1869.45,2474.16 1804.24,2539.37 1804.24,2664.06 1803.95,2715.36 1840.34,2751.76 1887.44,2751.76 1911.53,2775.84 U6.7@1911.53,2832.58
HAPTIC-OUT-: HAPTIC.2 U6.9 | length 434.7
  Top Layer w8.31: HAPTIC.2@1738.46,2474.16 1787.64,2523.34 1787.64,2736.05 1823.55,2771.96 1859.25,2771.96 1872.16,2784.87 U6.9@1872.16,2832.58
KEEPOUT: 
LED1_2: LED1.2 R10.1 | length 73.7
  Bottom Layer w8.4: R10.1@2386.74,1921.7 2395.26,1913.18 LED1.2@2395.27,1851.53
LRCLK: R23.1 U15.14 | length 141.8
  Top Layer w6.3: U15.14@2114.32,1804.31 2114.32,1785.93 2098.25,1769.86 2098.25,1748.36 2113.44,1733.16 R23.1@2171.14,1733.16
MISO: R11.2 U1.33 | length 513.4
  Top Layer w10: R11.2@2280.79,2131.9 2280.79,2157.49 v1(2290.3,2167) ; v1(2502.5,2345) 2524.65,2345 2554.76,2314.89 U1.33@2584.78,2314.89
  Mid-Layer 2 w10: v1(2290.3,2167) 2273.62,2167.03 2273.62,2269.93 2318.82,2315.13 2428.92,2315.13 2458.79,2345 v1(2502.5,2345)
MOSI: DISPLAY.6 R29.2 U3.5 | length 617
  Top Layer w8: U3.5@2408.2,2073.2 2408.2,2102.71 2413.32,2107.83 2476.12,2107.83 2479.02,2104.93 2490.52,2104.93 2502.62,2092.83 2546.22,2092.83 2617.92,2164.53 2631.42,2164.53 2644.82,2177.93 2644.82,2208.83 2637.82,2216.43 2637.82,2251.23 2652.72,2266.03 R29.2@2652.73,2278.83 ; R29.2@2652.73,2278.83 2688.01,2314.1 v1(2695.8,2314.1)
  Bottom Layer w5.98: v1(2695.8,2314.1) 2719,2314.1 2732.1,2327.2 2732.1,2356.7 2747.45,2372.06 DISPLAY.6@2794.22,2372.06
Q3_1: Q3.1 U7.2 | length 91.3
  Bottom Layer w25: Q3.1@1989.1,1898.87 2006.62,1916.39 U7.2@2006.62,1982.93
Q4_1: Q4.1 R15.1 | length 429.9
  Top Layer w9: v1(2435.5,1854.2) 2435.5,1846.56 R15.1@2460.36,1821.7
  Mid-Layer 2 w8.31: v1(2289.42,1838.47) 2334.62,1838.47 2339.95,1843.8
  Mid-Layer 2 w9: 2339.95,1843.8 2425.02,1843.73 v1(2435.5,1854.2)
  Bottom Layer w6.3: Q4.1@2128.88,1916.56 2160.84,1916.56 2200.85,1876.56 2200.85,1833.86 2216.2,1818.5 2269.45,1818.5 v1(2289.42,1838.47)
R12_2: Q2.1 R12.2 | length 66.5
  Bottom Layer w14: R12.2@2611.2,2558.84 2617.63,2565.27 Q2.1@2675,2565.27
R16_2: R16.2 U8.7 | length 67.5
  Top Layer w8: R16.2@2708.94,2569.1 2724.12,2569.13 2746.82,2546.33 U8.7@2746.82,2526.23
R20_2: R20.2 U8.8 | length 121.5
  Top Layer w8: R20.2@2649.82,2468.12 2649.82,2502.31 2673.78,2526.27 U8.8@2727.15,2526.27
R25_2: Q2.2 R25.2 | length 73.7
  Bottom Layer w14: R25.2@2719.98,2626.63 2719.96,2599.14 2749.8,2569.3 Q2.2@2749.8,2565.27
R27_2: R26.2 R27.2 U1.4 | length 135.6
  Top Layer w18.3: U1.4@2033.6,2616.07 2076.56,2616.07 v1(2077.1,2616.6)
  Bottom Layer w8: v1(2077.1,2616.6) 2081.91,2621.41 R26.2@2101.22,2621.44
  Bottom Layer w8.31: R26.2@2101.22,2621.44 2121.5,2641.72 R27.2@2121.5,2678.76